# Altium PCB PCB)ControlBoard_22062018.PcbDoc
Units mm, origin at the board's own origin, x right, y up, seen from the top; angles counter-clockwise.
Board outline 55 x 77.5 mm, 2 copper layers (Top Layer, Bottom Layer), stack 1.671 mm thick; 62 components, 42 nets, 194 pads, 38 vias.
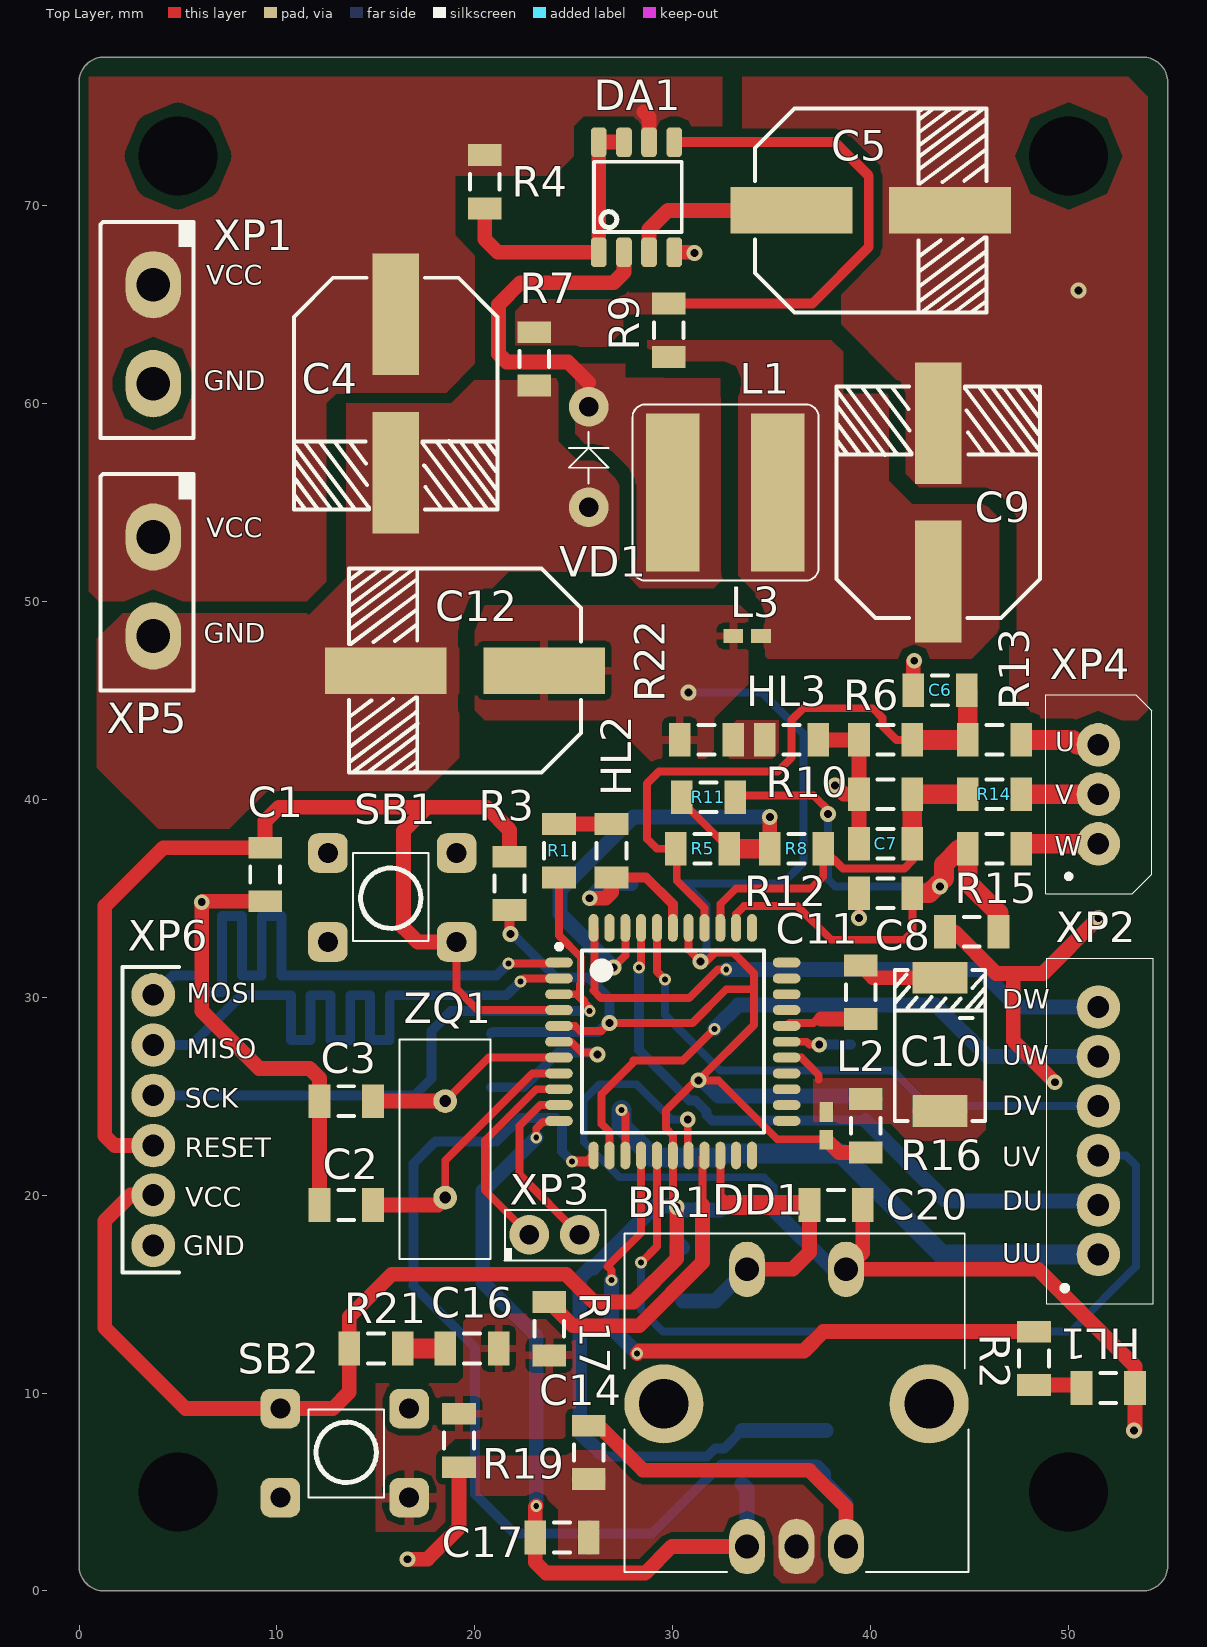
[diagram p0: Top Layer view]
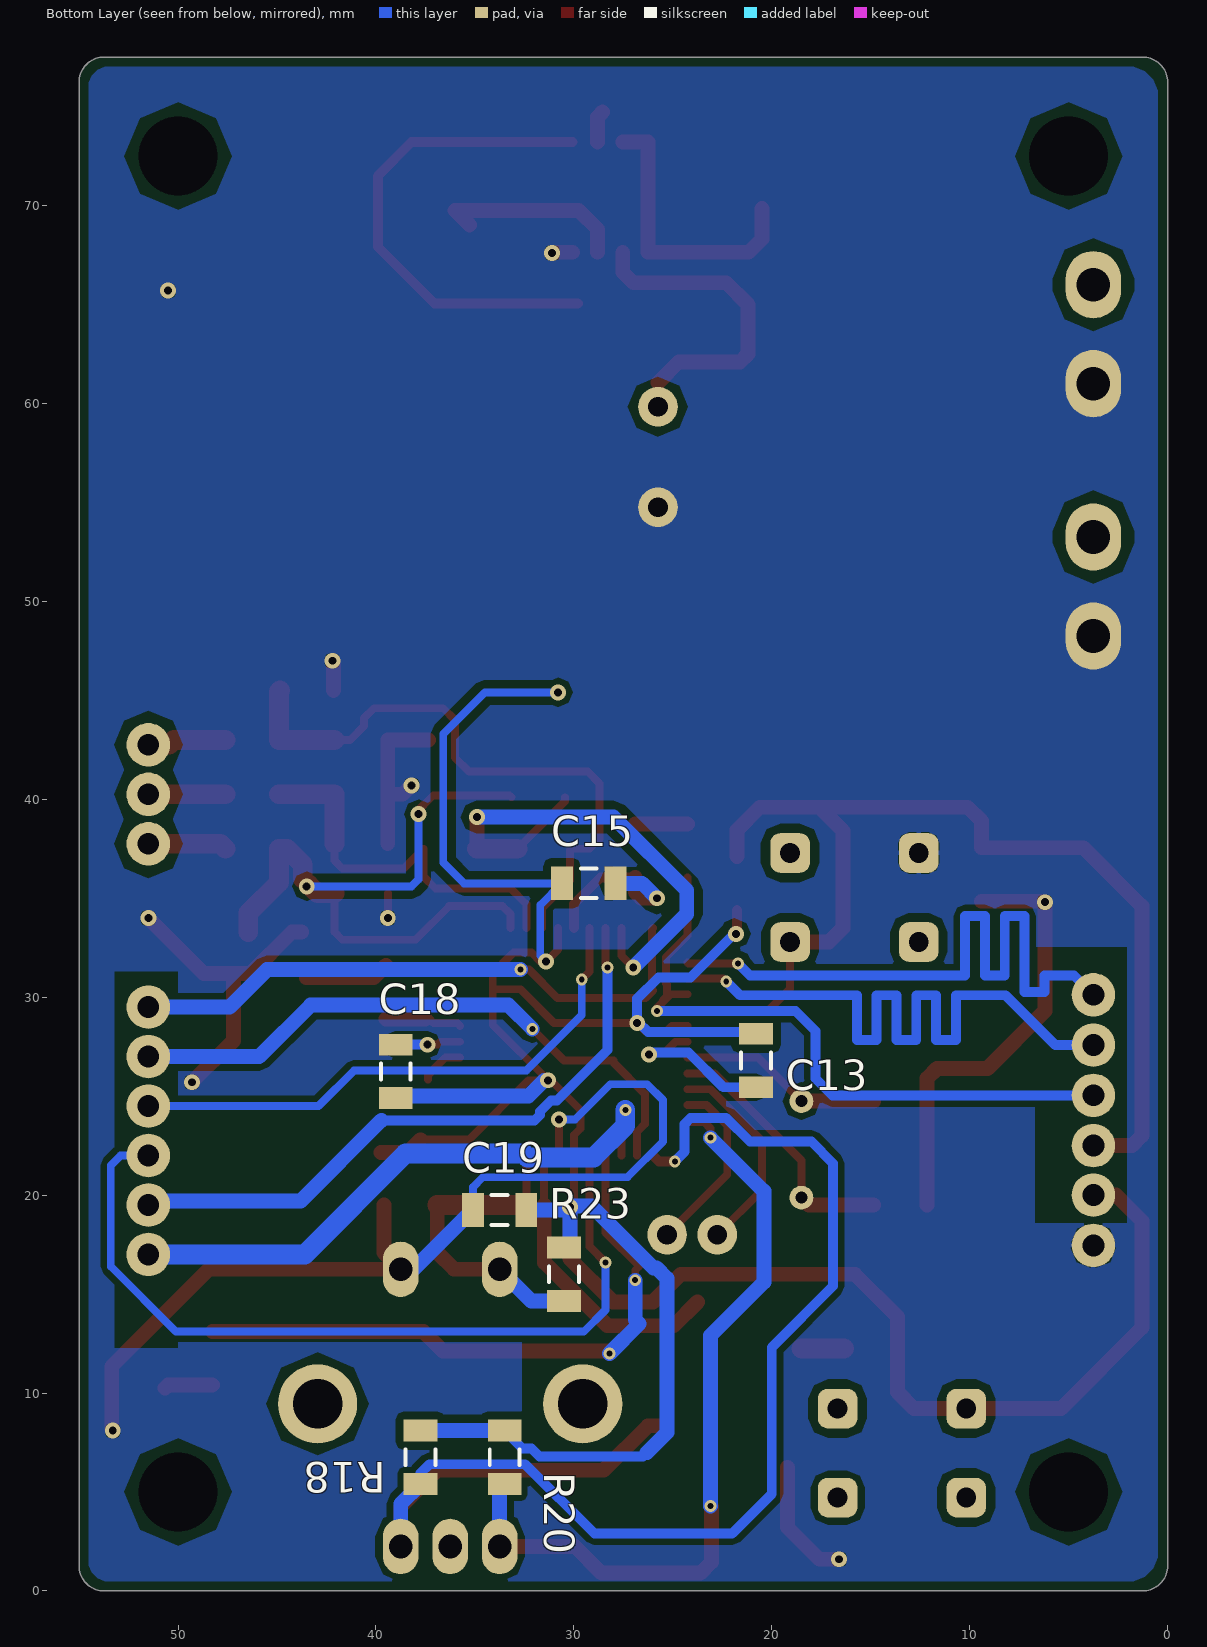
[diagram p1: Bottom Layer view, seen from below]
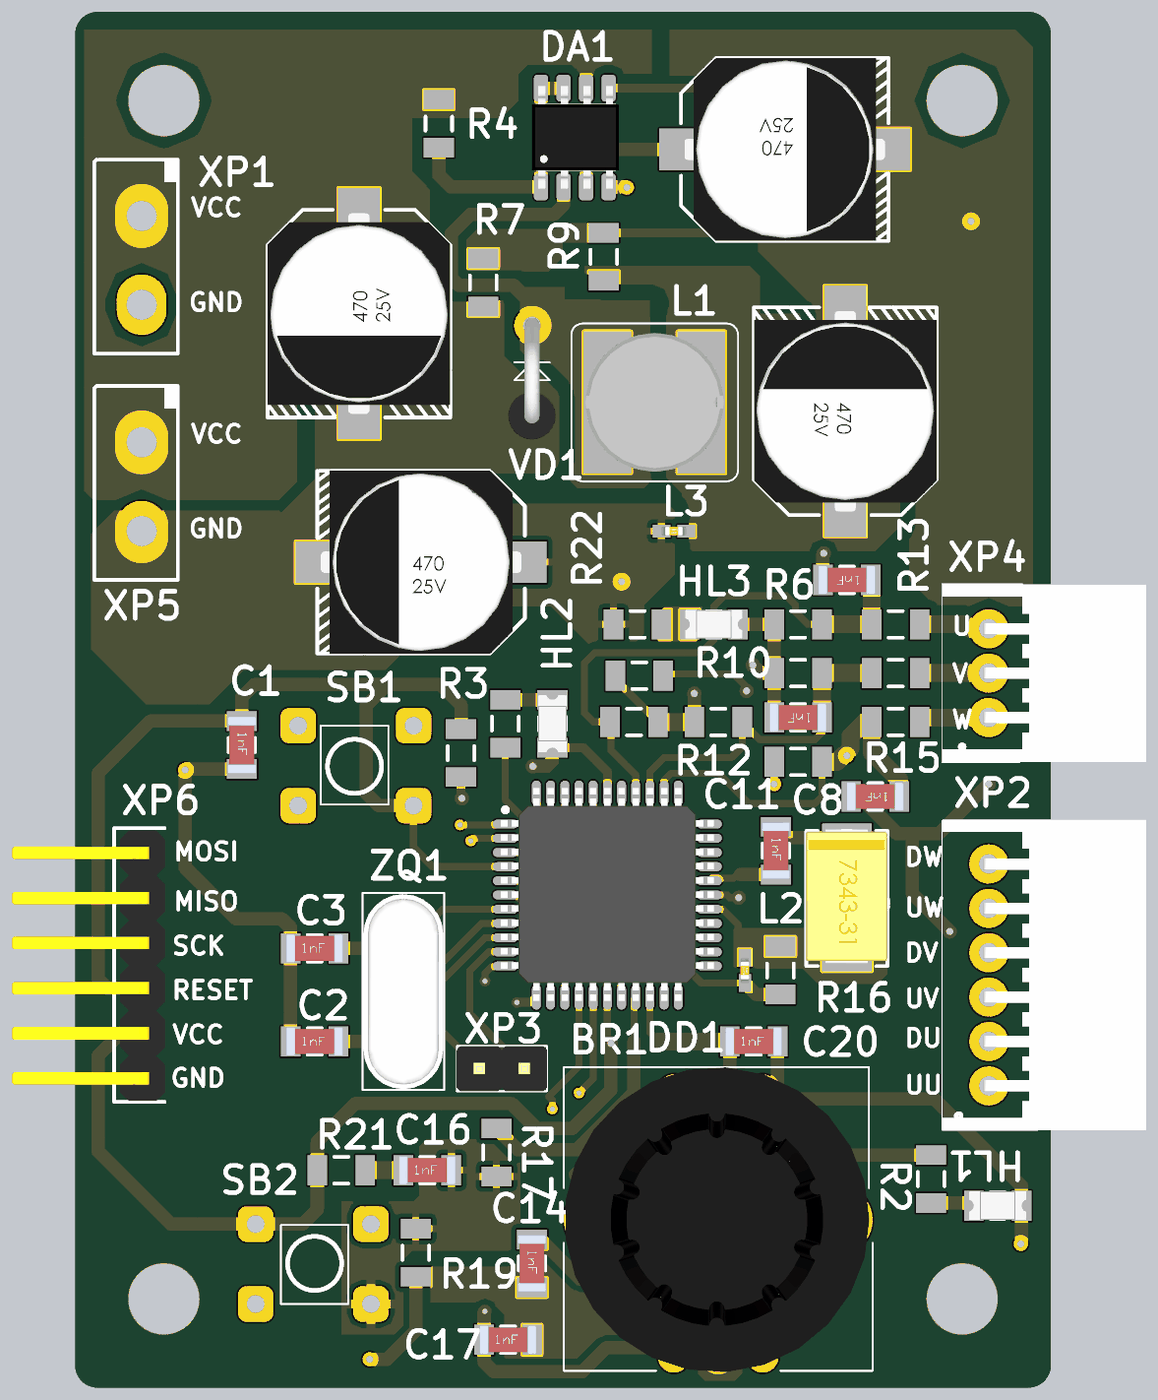
[diagram p2: 3D render of the assembled board from above, using the file's embedded part models]
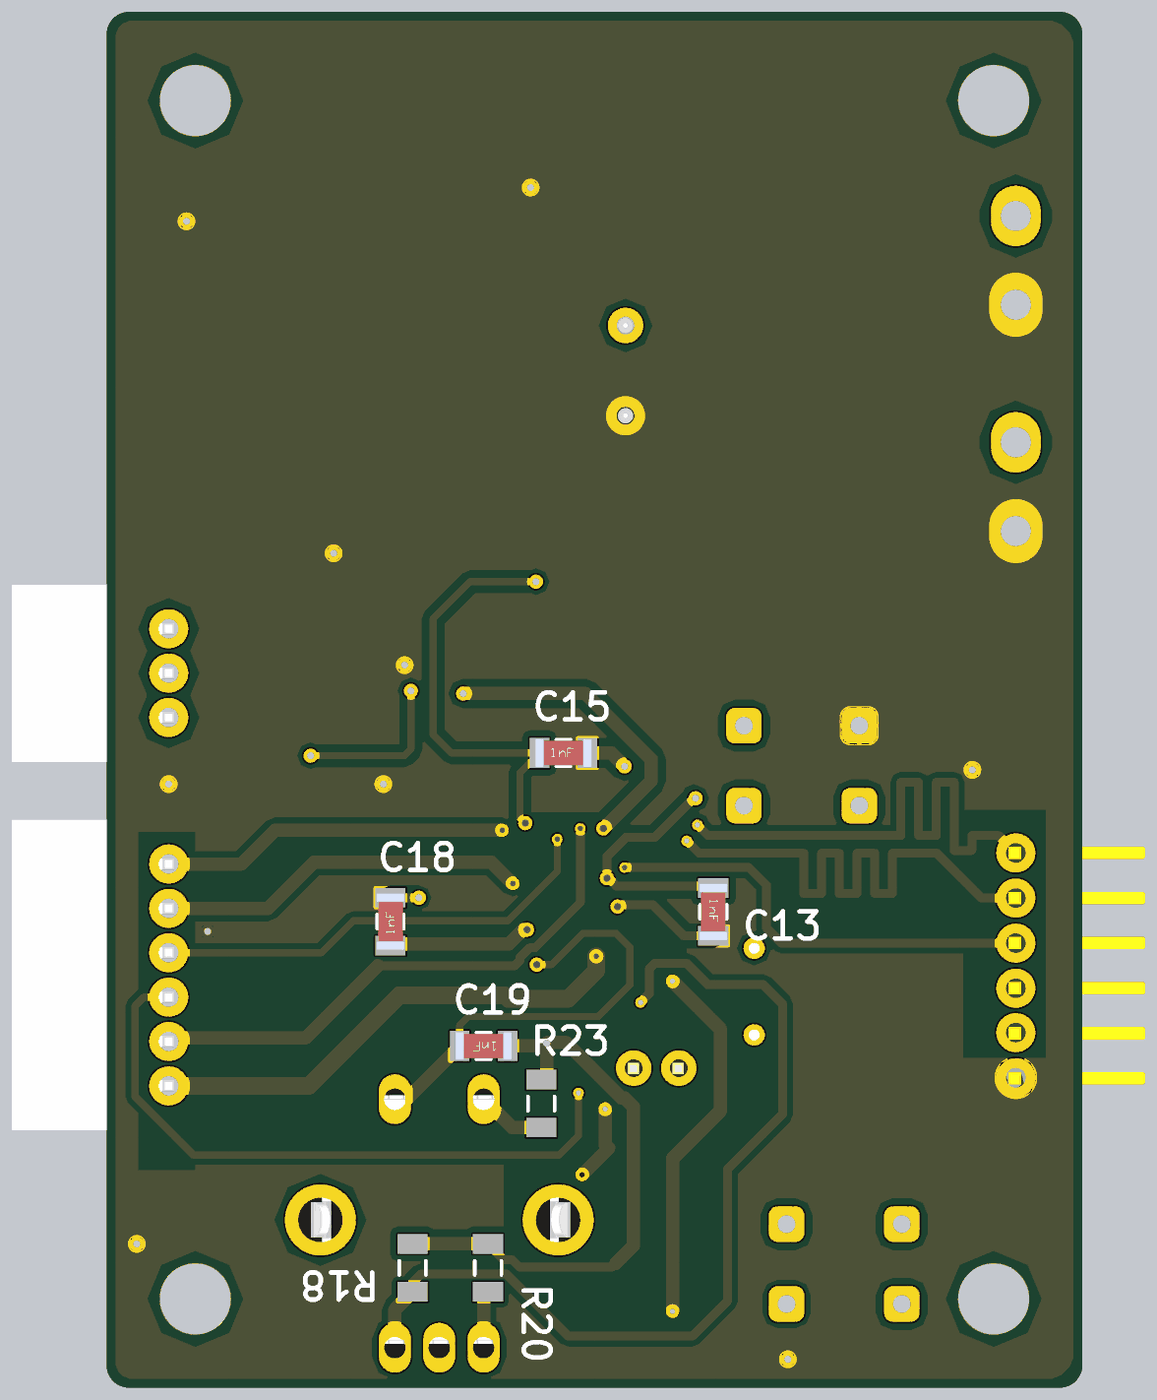
[diagram p3: 3D render of the assembled board from below, using the file's embedded part models]

## Layer stack, top to bottom
Top Solder: solder mask 0.0102, Solder Resist, Dk 3.5
Top Layer: signal copper 0.0356
Dielectric 1: dielectric 1.6, FR-4, Dk 4.8
Bottom Layer: signal copper 0.0356
Bottom Solder: solder mask 0.0102, Solder Resist, Dk 3.5

## Board outline
0,1.27 0,76.23 cw(c1.27,76.23) 1.27,77.5 53.73,77.5 cw(c53.73,76.23) 55,76.23 55,1.27 cw(c53.73,1.27) 53.73,0 1.27,0 cw(c1.27,1.27)

## Design rules (kind name [scope] priority, off if disabled: settings)
Clearance Clearance_12V [InNetClass('Input_Power')] p1: gap=0.5 ignorepadtopadclearanceinfootprint=FALSE except(0.3: Arc-THPad Track-THPad SMDPad-SMDPad SMDPad-THPad THPad-THPad; 0.4: Arc-Track Track-Track Track-SMDPad)
Clearance Clearance_NetSignal [InNetClass('Nets_Signal')or InNetClass('SPI_Prog')] p2: gap=0.5 ignorepadtopadclearanceinfootprint=FALSE except(0.2: Track-SMDPad SMDPad-SMDPad Via-Via; 0.3: Arc-Track Arc-SMDPad Arc-THPad Arc-Via Arc-Poly Track-Track Track-THPad Track-Via Track-Poly SMDPad-Via SMDPad-Poly THPad-THPad THPad-Via THPad-Poly Via-Poly; 0.8: Poly-Poly)
Clearance Clearance_Poligon [InPolygon] p3: gap=0.5 ignorepadtopadclearanceinfootprint=FALSE except(0.2: Arc-Via Track-Via SMDPad-Via THPad-Via Via-Via Via-Fill Via-Poly Via-Region; 0.3: Arc-THPad Arc-Fill Arc-Region Track-THPad Track-Fill Track-Region SMDPad-Fill SMDPad-Region THPad-Fill THPad-Region; 0.4: Arc-Arc Arc-Track Arc-SMDPad Arc-Poly Track-Track Track-SMDPad Track-Poly SMDPad-SMDPad SMDPad-Poly THPad-Poly Fill-Fill Fill-Poly Fill-Region Poly-Region Region-Region; 0.8: Poly-Poly)
Clearance Clearance_Power [InNetClass('Nets_5Vout')] p4: gap=0.5 ignorepadtopadclearanceinfootprint=FALSE except(0.2: Track-SMDPad SMDPad-SMDPad; 0.3: Arc-Track Arc-SMDPad Track-Track Track-THPad THPad-THPad)
Height [All] p1: minheight=0 maxheight=100 prefheight=12.7
Length Length_SPI [InNetClass('SPI_Prog')] p1: maxlimit=600 minlimit=0
MatchedLengths MatchedLengths_SPI [InNetClass('SPI_Prog')] p1: tolerance=1 checknetsindiffpair=FALSE checkdiffpairvsdiffpair=TRUE checkxsignals=TRUE checkothers=TRUE
PlaneClearance PlaneClearance_1 [InPadClass('PadPower')] p1: clearance=0.8
PlaneClearance [InNetClass('Nets_Signal') OR InNetClass('SPI_Prog')  OR InNetClass('Nets_5Vout')] p2: clearance=0.5
PlaneConnect PlaneConnect__Digit [InNetClass('Nets_Signal') OR InNetClass('SPI_Prog') OR InNetClass('Nets_5Vout')] p1: pad.planeconnectstyle=Relief pad.reliefexpansion=0.5 pad.reliefentries=4 pad.reliefconductorwidth=0.4 pad.reliefairgap=0.3 via.planeconnectstyle=Relief via.reliefexpansion=0.4 via.reliefentries=4 via.reliefconductorwidth=0.4 via.reliefairgap=0.3
PlaneConnect [InPadClass('PadPower')] p2: planeconnectstyle=Direct reliefexpansion=0.508 reliefentries=4 reliefconductorwidth=0.254 reliefairgap=0.254
PolygonConnect PolygonConnect_DIG5V [InNetClass('Nets_Signal') OR InNetClass('SPI_Prog')] p1: thpad.connectstyle=Relief thpad.reliefconductorwidth=0.5 thpad.reliefentries=4 thpad.polygonreliefangle="90 Angle" thpad.airgapwidth=0.3 smdpad.connectstyle=Relief smdpad.reliefconductorwidth=0.4 smdpad.reliefentries=4 smdpad.polygonreliefangle="90 Angle" smdpad.airgapwidth=0.3 via.connectstyle=Relief via.reliefconductorwidth=0.4 via.reliefentries=4 via.polygonreliefangle="90 Angle" via.airgapwidth=0.3
PolygonConnect PolygonConnect_Power [InPadClass('PadPower')] p2: connectstyle=Direct reliefconductorwidth=0.254 reliefentries=4 polygonreliefangle="90 Angle" airgapwidth=0.254
RoutingVias RoutingVias_Signal [InNetClass('Nets_Signal') OR InNetClass('SPI_Prog')] p1: holewidth=0.3 width=0.6 viastyle="Through Hole" minholewidth=0.3 minwidth=0.6 maxholewidth=0.3 maxwidth=0.6
RoutingVias RoutingVias_Power [InNetClass('Input_Power') OR InNetClass('Nets_5Vout')] p2: holewidth=0.4 width=0.8 viastyle="Through Hole" minholewidth=0.4 minwidth=0.8 maxholewidth=0.4 maxwidth=0.8
SolderMaskExpansion [All] p1: expansion=0.102
Width Width_5V [InNetClass('Nets_5Vout')] p1: maxlimit=2 minlimit=0.4 preferedwidth=0.5
Width Width_12V [InNetClass('Input_Power')] p2: maxlimit=2 minlimit=0.5 preferedwidth=0.75
Width Width_DIGIT [InNetClass('Nets_Signal') OR InNetClass('SPI_Prog')] p3: maxlimit=1 minlimit=0.2 preferedwidth=0.4
27 further rules are at their usual default settings.

## Classes and differential pairs
net class SPI_Prog: MISO MOSI SCK
net class Nets_Signal: DOWN_U DOWN_V DOWN_W ENC1 ENC2 ENC3 NetC16_1 NetC16_2 NetDD1_15 NetHL1_1 NetHL2_1 RxD TxD UP_U UP_V UP_W XTAL1 XTAL2
net class Nets_5Vout: +5V ADC_COMP ADC_U ADC_V ADC_W AREF AVCC GND NetC9_1 NetC10_2 NetDA1_2 NetDA1_5 NetHL3_1 RESET
net class Input_Power: +12V NetDA1_1 NetR13_1 NetR14_1 NetR15_1
pad class PadPower: BR1-3 C4-1 C4-2 C5-1 C5-2 C9-1 C9-2 C12-1 C12-2 HL3-1 HL3-2 L1-1 L1-2 L3-1 L3-2 R4-1 R4-2 R7-1 R7-2 R9-1 R9-2 R13-1 R13-2 R14-1 R14-2 R15-1 R15-2 R22-1 R22-2 VD1-1 VD1-2 XP1-1 XP1-2 XP5-1 XP5-2

## Components (designator, comment, footprint, x,y, rotation, side; value= is the part's Value field where it differs from the comment)
BR1 "EN11 - VSM 1 A F 20" EN11-HSM 33.75,2.25 r0 top
C1 "100nF" CAP1206 9.4,36.2 r270 top
C2 "22pF" CAP1206 13.5,19.5 r0 top
C3 "22pF" CAP1206 13.5,24.75 r0 top
C4 "220uF" CAPAE120103X105MTypeG 16,60.5 r270 top
C5 "470uF" CAPAE120103X105MTypeG 40,69.75 r0 top
C6 "100nF" CAP1206 43.5,45.5 r180 top
C7 "100nF" CAP1206 40.75,37.75 r180 top
C8 "100nF" CAP1206 45.1,33.3 r180 top
C9 "470uF" CAPAE120103X105MTypeG 43.409,55 r90 top
C10 "10uF" "Type D" 43.5,24.25 r90 top
C11 "100nF" CAP1206 39.5,30.25 r270 top
C12 "220uF" CAPAE120103X105MTypeG 19.5,46.5 r180 top
C13 "100nF" CAP1206 20.8,26.8 r270 bottom
C14 "100nF" CAP1206 25.75,7 r270 top
C15 "100nF" CAP1206 29.25,35.75 r180 bottom
C16 "100nF" CAP1206 19.85,12.25 r0 top
C17 "100nF" CAP1206 24.4,2.7 r0 top
C18 "100nF" CAP1206 39,26.25 r90 bottom
C19 "100nF" CAP1206 33.75,19.25 r0 bottom
C20 "100nF" CAP1206 38.25,19.5 r0 top
DA1 "MC34063" SO-8 26.26,68.4 r90 top
DD1 "ATMega16" TQFP80P1200X1200X120-44N 30,27.75 r0 top
HL1 "GNL-1206UYC" LED1206 52,10.25 r0 top value=YELLOW
HL2 "GNL-1206UYC" LED1206 26.9,37.4 r270 top value=YELLOW
HL3 "GNL-1206URC" LED1206 36,43 r0 top value=RED
L1 "SDR0805-221KL" SDR0805 30,55.5 r270 top value=220uH
L2 "1u" LQG15HN15NJ 37.75,23.5 r270 top
L3 "1u" LQG15HN15NJ 33.75,48.25 r180 top
R1 "470" 1206 24.25,37.4 r90 top
R2 "470" 1206 48.25,11.75 r270 top
R3 "1k Ом" 1206 21.75,35.75 r270 top
R4 "0,33 Ом" 1206 20.5,71.2 r270 top
R5 "4.7 кОм" 1206 31.5,37.5 r180 top
R6 "10кОм" 1206 40.75,43 r180 top
R7 "1.2k Ом" 1206 23,62.25 r90 top
R8 "4.7 кОм" 1206 36.25,37.5 r0 top
R9 "3.6kОм" 1206 29.8,63.7 r270 top
R10 "10кОм" 1206 40.75,40.25 r180 top
R11 "4.7 кОм" 1206 31.8,40.1 r0 top
R12 "10кОм" 1206 40.75,35.25 r180 top
R13 "4.7 кОм" 1206 46.25,43 r180 top
R14 "4.7 кОм" 1206 46.25,40.25 r180 top
R15 "4.7 кОм" 1206 46.25,37.5 r180 top
R16 "2 кОм" 1206 39.75,23.5 r270 top
R17 "220" 1206 23.75,13.25 r270 top
R18 "4.7 кОм" 1206 37.75,6.75 r90 bottom
R19 "10кОм" 1206 19.2,7.6 r90 top
R20 "4.7 кОм" 1206 33.5,6.75 r90 bottom
R21 "130 Ом" 1206 15,12.25 r180 top
R22 "470" 1206 31.7,43 r180 top
R23 "4.7 кОм" 1206 30.5,16 r90 bottom
SB1 "IT-1109" KLS2 15.75,35 r0 top
SB2 "IT-1109" KLS2 13.5,7 r180 top
VD1 "1N5819" DO-41-V 25.75,54.75 r90 top value=40V
XP1 "XY2500R-A-2P" KLS2-EDR-500-2P 3.75,66 r270 top value=1000V
XP2 "CWF-6R" CWF-6R 51.5,17 r90 top
XP3 "PLS2-1" PLS-2-1 22.75,18 r0 top
XP4 "CWF-3R" CWF-3R 51.5,37.75 r90 top
XP5 "XY2500R-A-2P" KLS2-EDR-500-2P 3.75,53.25 r270 top value=1000V
XP6 "PLS1x6" PLS1x6 3.75,30.12 r270 top
ZQ1 "8MHz" HC49-S 18.5,19.87 r90 top

## Footprints (in the part's own frame and the unit in brackets; to place one, negate y for a bottom-side part, rotate by r counter-clockwise, add the part's x,y. Pads: shape width x height; smd on the part's side, far side on the other; paste and mask are expansions set on the pad)
1206 [mm]
  rect 1.1x1.7 smd: 1(-1.35,0) 2(1.35,0)
  silkscreen extent -0.4,-0.75 0.4,0.75, body extent -1.55,-0.83 1.55,0.83, height 0.67
CAP1206 [mm]
  rect 1.1x1.7 smd: 1(-1.35,0) 2(1.35,0)
  silkscreen extent -0.4,-0.75 0.4,0.75, body extent -1.6,-0.8 1.6,0.8, height 1.25
CAPAE120103X105MTypeG [mm] "Aluminum Electrolytic Capacitor, Body 11,70x10,30x10,50mm, IPC Low Density"
  rect 6.15x2.35 smd: 1(-4,0) 2(4,0)
  silkscreen extent -5.85,-5.15 5.86,5.15, body extent -5.65,-5.15 5.65,5.15, height 10.8
CWF-3R [mm]
  round 2.2 hole 1.1: 1(5,0) 2(2.5,0) 3(0,0)
  silkscreen extent -2.52,-2.7 7.53,2.65, body extent -2.5,-8.88 7.5,2.62, height 5.75
CWF-6R [mm]
  round 2.2 hole 1.1: 1(0,0) 2(2.5,0) 3(5,0) 4(7.5,0) 5(10,0) 6(12.5,0)
  silkscreen extent -2.5,-2.78 14.97,2.63, body extent -2.5,-8.88 15,2.62, height 5.75
DO-41-V [mm] "Vertical"
  round 2 hole 1: 1(0,0) 2(5.08,0)
  silkscreen extent 1.2,-1 3.8,1, body extent -1.35,-1.35 5.51,1.35, height 8.43
EN11-HSM [mm]
  oval 1.8x2.8 hole 1.2: 1(0,0) 2(5,0) 3(2.5,0) 4(5,14) 5(0,14)
  round 4 hole 2.5: -(-4.2,7.2) -(9.2,7.2)
  silkscreen extent -6.2,-1.3 11.2,15.8, body extent -6.18,-1.39 11.02,15.81, height 34
HC49-S [mm]
  round 1.2 hole 0.6: 1(0,0) 3(4.88,0)
  silkscreen extent -3.1,-2.3 8,2.3, body extent -3.05,-2.25 7.93,2.25, height 3.6
KLS2 [mm]
  rrect50% 2x2 hole 1: 1(-3.175,2.286) 2(3.325,2.286) 3(-3.175,-2.214) 4(3.325,-2.214)
  silkscreen extent -1.91,-2.16 1.9,2.29, body extent -3.12,-3 3.38,3, height 7.5
KLS2-EDR-500-2P [mm]
  oval 3.4x2.8 hole 1.7: 1(0,0) 2(5,0)
  silkscreen extent -3.18,-2.67 7.75,2.03, body extent -3,-20.69 7.49,1.64, height 18.12
LED1206 [mm]
  rect 1.1x1.7 smd: 1(-1.35,0) 2(1.35,0)
  silkscreen extent -0.4,-0.75 0.4,0.75, body extent -1.6,-0.8 1.6,0.8, height 1.1
LQG15HN15NJ [mm]
  rect 1x0.7 smd: 1(-0.7,0) 2(0.7,0)
  body extent -0.73,-0.25 0.73,0.25, height 0.51
PLS1x6 [mm]
  round 2.2 hole 1.1: 1(0,0) 2(2.54,0) 3(5.08,0) 4(7.62,0) 5(10.12,0) 6(12.66,0)
  silkscreen extent -1.4,-1.55 14.03,1.3, body extent -1.27,-7.29 13.97,1.33, height 6.55
PLS-2-1 [mm]
  round 2 hole 1: 1(0,0) 2(2.54,0)
  silkscreen extent -1.25,-1.33 3.85,1.25, body extent -1.24,-1.3 3.84,1.24, height 8.54
SDR0805 [mm]
  rect 8x2.7 smd: 1(0,0) 2(0,5.3)
  silkscreen extent -4.45,-2.03 4.44,7.37, body extent -3.9,-1.23 3.9,6.57, height 5.3
SO-8 [mm]
  rrect50% 1.505x0.802 smd: 1(-0.762,0) 2(-0.762,-1.27) 3(-0.762,-2.54) 4(-0.762,-3.81) 5(4.8,-3.81) 6(4.8,-2.54) 7(4.8,-1.27) 8(4.8,0)
  silkscreen extent 0.25,-4.19 3.81,0.25, body extent -0.86,-4.39 4.92,0.51, height 1.45
TQFP80P1200X1200X120-44N [mm] "TQFP, 44-Leads, Body 10,00x10,00mm, Pitch 0,80mm, IPC Medium Density"
  oval 1.4x0.5 smd: 1(-5.75,4) 2(-5.75,3.2) 3(-5.75,2.4) 4(-5.75,1.6) 5(-5.75,0.8) 6(-5.75,0) 7(-5.75,-0.8) 8(-5.75,-1.6) 9(-5.75,-2.4) 10(-5.75,-3.2) 11(-5.75,-4) 23(5.75,-4) 24(5.75,-3.2) 25(5.75,-2.4) 26(5.75,-1.6) 27(5.75,-0.8) 28(5.75,0) 29(5.75,0.8) 30(5.75,1.6) 31(5.75,2.4) 32(5.75,3.2) 33(5.75,4)
  oval 0.5x1.4 smd: 12(-4,-5.75) 13(-3.2,-5.75) 14(-2.4,-5.75) 15(-1.6,-5.75) 16(-0.8,-5.75) 17(0,-5.75) 18(0.8,-5.75) 19(1.6,-5.75) 20(2.4,-5.75) 21(3.2,-5.75) 22(4,-5.75) 34(4,5.75) 35(3.2,5.75) 36(2.4,5.75) 37(1.6,5.75) 38(0.8,5.75) 39(0,5.75) 40(-0.8,5.75) 41(-1.6,5.75) 42(-2.4,5.75) 43(-3.2,5.75) 44(-4,5.75)
  silkscreen extent -5.87,-4.6 4.6,4.92, body extent -6,-5.97 6,6.03, height 1.1
"Type D" [mm]
  rect 1.6x2.8 smd: 1(0,0) 2(6.731,0)
  silkscreen extent -0.51,-2.29 7.11,2.29, body extent -0.37,-2.29 7.23,2.31, height 3.1

## Part data
BR1: library part Encoder, Manufacturer=TTelectronics, Package=CWF-3R, Documentation=http://belchip.by/sitedocs/18676.pdf, Part Number="EN11 - VSM 1 A F 20", Price=0.05, Quantity=3, ShoppingPlace=http://belchip.by/product/?selected_product=17773
C1 C6 C7 C8 C11 C13 C14 C15 C16 C17 C18 C19 C20: library part Capasitor, Manufacturer=Samsung, Package=1206, Part Number=CL31B104KBCNNNC, Voltage=50V, Price=0,035, Quantity=4, ShoppingPlace=http://belchip.by/product/?selected_product=31093
C2 C3: library part Capasitor, Manufacturer=Samsung, Package=1206, Part Number=NPO-50V, Voltage=50V, Price=0.025, Quantity=2, ShoppingPlace=http://belchip.by/product/?selected_product=00259
C4 C12: library part "Capasitor Electrolit", Manufacturer=Китай, Package=10x10, Part Number="220uF 35V 10x10", Power=10V, Documentation=http://belchip.by/product/?selected_product=32976, Price=1, Quantity=3, ShoppingPlace=http://belchip.by/product/?selected_product=32976
C5 C9: library part "Capasitor Electrolit", Manufacturer=EPCOS, Package=8x10, Part Number=B41121A3477M000, Power=25V, Documentation=https://static.chipdip.ru/lib/051/DOC000051935.pdf, Price=2, ShoppingPlace=https://www.ru-chipdip.by/product/b41121a3477m000
C10: library part "Capasitor Electrolit", Manufacturer=Vishay, Package=TypeD, Part Number="D 10uF 25V 20", Power=25V, Price=0,23, ShoppingPlace=http://belchip.by/product/?selected_product=00096
DA1: Manufacturer="ON Semiconductor", Package=SO-8, Part Number=MC34063, Price=0,3, Quantity=1, ShoppingPlace=http://belchip.by/product/?selected_product=28823
DD1: library part "ATMega 16", Manufacturer=ATmel, Package=TQFP44, Documentation=http://belchip.by/sitedocs/00002095.pdf, Part Number=ATMega16, Price=5,2, Quantity=1, ShoppingPlace=http://belchip.by/product/?selected_product=02095
HL1 HL2 HL3: library part LED, Manufacturer=G-NOR, Package=1206, Price=0.06, Quantity=6
  HL1 HL2: Part Number=GNL-1206UYC, ShoppingPlace=http://belchip.by/product/?selected_product=00949
  HL3: Part Number=GNL-1206URC, ShoppingPlace=http://belchip.by/product/?selected_product=00953
L1: library part Induc_SD1105, Manufacturer=BOURNS, Package=SDR0805, Documentation=http://docs-europe.electrocomponents.com/webdocs/150d/0900766b8150ddf1.pdf, Part Number=SDR0805-221KL, Price=1, Quantity=1, ShoppingPlace=https://www.ru-chipdip.by/product/sdr1105-201k
L2 L3: library part Inductor, Manufacturer=Bourns, Package=1812, Part Number=CM453232-1R0KL, Price=0.225, Quantity=2, ShoppingPlace=https://www.ru-chipdip.by/product/cm453232-1r0kl
R1 R2 R22: library part Resistor, Manufacturer=YAGEO, Package=1206, Part Number=RC1206JR-07470RL, Power=0.25W, Price=0.15, Quntity=3, ShoppingPlace=http://belchip.by/product/?selected_product=32449
R3: library part Resistor, Manufacturer="Royal Ohm", Package=1206, Part Number=RC1206FR-071KL, Power=0.25W, Price=0,02, Quntity=1, ShoppingPlace=http://belchip.by/product/?selected_product=19295
R4: library part Resistor, Manufacturer="Royal Ohm", Package=1206, Part Number=RC1206FR-12060R33, Power=0.25W, Documentation=http://belchip.by/sitedocs/18520.pdf, Price=0,5, Quntity=1, ShoppingPlace=http://belchip.by/product/?selected_product=32979
R5 R6 R8 R10 R11 R12 R13 R14 R15 R18 R20 R23: library part Resistor, Manufacturer=YAGEO, Package=1206, Part Number=RC1206JR-074K7L, Power=0.25W, Price=0,15, Quntity=4, ShoppingPlace=http://belchip.by/product/?selected_product=01399
R7: library part Resistor, Manufacturer=РФ, Package=1206, Part Number="1206 1.2K", Power=0.25W, Price=0,15, Quntity=1, ShoppingPlace=http://belchip.by/product/?selected_product=01386
R9: library part Resistor, Manufacturer=РФ, Package=1206, Part Number="1206 3.6K", Power=0.25W, Price=1, Quntity=1, ShoppingPlace=http://belchip.by/product/?selected_product=01396
R16: library part Resistor, Manufacturer=РФ, Package=1206, Part Number="SMD 1206 2K", Power=0,25W, Price=0,15, Quntity=1, ShoppingPlace=http://belchip.by/product/?selected_product=01391
R17: library part Resistor, Manufacturer="Royal Ohm", Package=1206, Part Number=HP06-220R5, Power=0.25W, Price=0,02, Quntity=1, ShoppingPlace=http://belchip.by/product/?selected_product=06325
R19: library part Resistor, Manufacturer=YAGEO, Package=1206, Part Number=RC1206JR-0710KL, Power=0.25W, Price=0.15, Quntity=1, ShoppingPlace=http://belchip.by/product/?selected_product=31101
R21: library part Resistor, Manufacturer=RF, Package=1206, Part Number=130R, Power=0.25W, Price=0,15, Quntity=1, ShoppingPlace=http://belchip.by/product/?selected_product=01363
SB1 SB2: library part Button, Manufacturer=RUICHI, Package=4,5x4,5x3,8, Part Number=IT-1109, Price=0,1, Quantity=2, ShoppingPlace=http://belchip.by/product/?selected_product=03267
VD1: Manufacturer=GALAXY, Package=SOD-123, Power=1A, Part Number=1N5819, Price=0.12, Quantity=3, ShoppingPlace=http://belchip.by/product/?selected_product=08853
XP1 XP5: library part Connector_Power, Manufacturer=РБ, Package=XY2500R-A-2P, Part Number=XY2500R-A-2P, Price=0,10, Quantity=2, ShoppingPlace=http://belchip.by/product/?selected_product=14514
XP2 XP3 XP4: Manufacturer=KLS
  XP2: Part Number=CWF-6R, Price=1, Quantity=1, ShoppingPlace=http://belchip.by/product/?selected_product=32444
  XP3: Package=PLS2-1, Part Number=PLS2-1, Price=0.05, Quantity=3, ShoppingPlace=http://belchip.by/product/?selected_product=31993
  XP4: Package=CWF-3R, Part Number=CWF-3R, Price=0.05, Quantity=3, ShoppingPlace=http://belchip.by/product/?selected_product=32444
XP6: Manufacturer=KLS, Part Number=KLS1x6, Price=1, Quantity=1, ShoppingPlace=http://belchip.by/product/?selected_product=02010
ZQ1: library part Rzanator, Manufacturer=CHina, Package=HC-51, Part Number=HC49US-FF5F8.0000, Price=0,37, Quantity=1, ShoppingPlace=http://belchip.by/product/?selected_product=04623

## Free pads (board coordinates)
  round 0 hole 4: -(5,5) -(5,72.5) -(50,5) -(50,72.5)

## Via types
v1: diameter 0.8, hole 0.4, Top Layer to Bottom Layer, 13 vias
v2: diameter 0.6, hole 0.3, Top Layer to Bottom Layer, 10 vias
v3: diameter 0.8, hole 0.4, Top Layer to Bottom Layer, tented top, 9 vias
v4: diameter 0.6, hole 0.3, Top Layer to Bottom Layer, tented top, 4 vias
v5: diameter 0.8, hole 0.4, Top Layer to Bottom Layer, tented both sides, 2 vias

## Nets (pads, with @x,y where several pads share a name; then routed paths per layer and width w, separated by ;. In a path a pad name is that pad's centre, name@x,y a point inside that pad or via, vN(x,y) a via of type N, cw(c..) or ccw(c..) an arc to the next point about the centre after c; other vN are vias at no path point)
+5V: C12.1 C13.1 C15.1 C18.1 C19.1 DD1.5 DD1.17 DD1.38 L2.2 L3.2 R3.2 R16.2 R18.2 R20.2 R21.2 R22.2 R23.2 SB2.4 XP6.5 | length 167.2
  Top Layer w0.4: DD1.5 25.05,28.55 25.3,28.3 26.4,28.3 v1(26.8,28.7) 31,28.7 32.7,30.4 34.1,30.4 ; 30,19.8 DD1.17 30,23.027 29.655,23.372 29.655,24.283 31.172,25.8 v1(31.3,25.8) ; DD1.38 30.8,32.4 v1(31.4,31.8) 31.683,31.8 32.133,32.25 33.052,32.25 33.151,32.151 34.1,31.202 34.1,30.4 ; L2.2 35.3,22.8 32.3,25.8 v1(31.3,25.8) ; v1(31.3,25.8) 34.1,28.6 34.1,30.4
  Top Layer w0.5: R3.2 21.75,33.25 v3(21.8,33.2)
  Top Layer w0.75: XP6.5 2.6,20 1.3,18.7 1.3,13.3 5.386,9.214 SB2.4 12.814,9.214 13.65,10.05 R21.2 13.65,13.85 15.8,16 24.6,16 26,14.6 28.015,14.6 30.2,16.785 v5(30.2,19.4) ; L2.2 38.4,22.15 R16.2
  Bottom Layer w0.4: v1(30.8,45.4) 34.5,45.4 36.6,43.3 36.6,36.8 35.55,35.75 C15.1 31.7,34.65 31.7,32.1 v1(31.4,31.8)
  Bottom Layer w0.5: C13.1 20.9,28.25 26.25,28.25 26.7,28.7 v1(26.8,28.7) 26.8,29.931 25.731,31 24.1,31 21.9,33.2 21.9,33.3 v3(21.8,33.2) ; 26.3,7 26.5,6.8 31.732,6.8 32.132,7.2 32.6,7.2 R20.2
  Bottom Layer w0.75: 26.3,7 25.3,8 25.3,15.8 25.825,16.325 25.984,16.325 29.1,19.441 30.159,19.441 v5(30.2,19.4) ; R23.2 30.2,17.65 v5(30.2,19.4) ; v1(31.3,25.8) 31.5,25.8 32.3,25 38.9,25 C18.1 ; C19.1 30.35,19.25 v5(30.2,19.4) ; R20.2 R18.2
+12V: C4.1 DA1.6 R4.1 XP1.1 XP5.1 | length 1.6
  Top Layer w0.75: 28.55,74.725 28.8,74.475 DA1.6
ADC_COMP: DD1.42 R5.1 R8.1 R11.1 | length 26.6
  Top Layer w0.4: v3(27,31.5) 27.6,32.1 DD1.42 ; R11.1 30.45,39.9 R5.1
  Top Layer w0.75: R8.1 v3(34.9,39.1)
  Top Layer w1: R5.1 R8.1
  Bottom Layer w0.75: v3(27,31.5) 24.3,34.2 24.3,35.4 28,39.1 v3(34.9,39.1)
ADC_U: C6.1 DD1.37 R5.2 R6.1 R13.2 | length 31.4
  Top Layer w0.4: DD1.37 31.6,34.5 30.2,35.9 30.2,37.45 R5.2 29.2,37.5 28.7,38 28.7,40.8 29.3,41.4 35.3,41.4 36,42.1 36,44 36.6,44.6 40.1,44.6 40.6,44.1 40.6,43.7 41.3,43 R6.1
  Top Layer w1: R6.1 R13.2 44.9,45.45 C6.1
ADC_V: C7.1 DD1.36 R8.2 R10.1 R14.2 | length 19.6
  Top Layer w0.4: DD1.36 32.4,34.7 33.2,35.5 37,35.5 37.6,36.1 R8.2 38.6,36.5 41.7,36.5 42.1,36.9 C7.1
  Top Layer w1: C7.1 R10.1 R14.2
ADC_W: C8.1 DD1.35 R11.2 R12.1 R15.2 | length 35.7
  Top Layer w0.4: R11.2 33.25,40.2 37.1,40.2 38,39.3 37.95,39.25 v3(37.847,39.25) ; DD1.35 33.2,34.2 33.6,34.6 36.3,34.6 38,32.9 41.7,32.9 42.1,33.3 R12.1
  Top Layer w1: R12.1 42.95,35.25 v1@43.4,35.7 ; 43.7,36 43.7,36.7 44.5,37.5 R15.2 44.9,35.8 46.45,34.25 C8.1
  Bottom Layer w0.4: v3(37.847,39.25) 37.847,35.953 38.2,35.6 v1(43.5,35.6)
AREF: C11.2 DD1.29 | length 3.9
  Top Layer w0.4: DD1.29 35.9,28.7 37.1,28.7 37.3,28.9 37.5,28.9
  Top Layer w0.75: 37.5,28.9 C11.2
AVCC: C10.1 DD1.27 L2.1 R16.1 | length 2.2
  Top Layer w0.4: DD1.27 36.494,26.95 37.375,26.069 37.375,25.85
DIR_BUT: DD1.19 R17.1 | length 15
  Top Layer w0.4: 31.5,19.5 31.5,21.9 DD1.19
  Top Layer w0.75: R17.1 24.95,13.4 28.3,13.4 31.5,16.6 31.5,19.5
DOWN_U: DD1.41 XP2.2 | length 32.8
  Top Layer w0.4: v2(28.3,31.5) 28.4,31.6 DD1.41
  Bottom Layer w0.5: v2(28.3,31.5) 28.3,27.325 30.848,24.777 31.149,24.777 31.705,24.221 31.705,24.051 31.981,23.775 39.725,23.775
  Bottom Layer w0.75: 39.725,23.775 43.8,19.7 51.3,19.7 XP2.2
DOWN_V: DD1.40 XP2.4 | length 28.4
  Top Layer w0.4: DD1.40 29.2,31.3 v2(29.6,30.9)
  Bottom Layer w0.4: v2(29.6,30.9) 29.6,29.1 32.4,26.3 41.1,26.3 42.9,24.5 XP2.4
DOWN_W: DD1.44 XP2.6 | length 30.3
  Top Layer w0.4: DD1.44 26.05,33.45 26.05,30.391 26,30.341 26,30.327 26.377,29.95 30.823,29.95 32.273,31.4 v2(32.7,31.4)
  Bottom Layer w0.75: v2(32.7,31.4) 45.5,31.4 47.4,29.5 XP2.6
ENC1: BR1.5 C20.1 DD1.20 R23.1 | length 16.5
  Top Layer w0.4: DD1.20 32.4,20 32.9,19.5
  Top Layer w0.75: BR1.5 36.05,16.25 36.9,17.1 C20.1
  Top Layer w1: 32.9,19.5 C20.1
  Bottom Layer w0.75: R23.1 32.15,14.65 BR1.5
ENC2: BR1.1 C17.1 DD1.11 R20.1 | length 40.2
  Top Layer w0.4: v4(23.1,22.9) 23.1,23.36 23.44,23.7 24.2,23.7 DD1.11
  Top Layer w0.75: v4(23.1,4.3) 23.05,4.25 C17.1 23.05,1.45 23.6,0.9 28.6,0.9 29.95,2.25 BR1.1
  Bottom Layer w0.75: v4(23.1,4.3) 23.1,12.9 20.4,15.6 20.4,20.2 v4(23.1,22.9) ; R20.1 33.75,5.15 BR1.1
ENC3: BR1.2 C14.1 DD1.12 R18.1 | length 70.9
  Top Layer w0.5: v4(24.9,21.7) 25.7,21.7 DD1.12
  Top Layer w0.75: C14.1 26.25,8.35 28.5,6.1 36.9,6.1 38.75,4.25 BR1.2
  Bottom Layer w0.5: v4(24.9,21.7) 24.4,22.2 24.4,23.6 24.1,23.9 22.3,23.9 21.1,22.7 18,22.7 16.9,21.6 16.9,15.4 20,12.3 20,4.9 22,2.9 28.964,2.9 32.464,6.4 37.3,6.4 37.75,5.95 R18.1
  Bottom Layer w0.75: R18.1 38.75,4.4 BR1.2
GND: BR1.3 BR1.4 C1.2 C2.1 C3.1 C4.2 C5.2 C6.2 C7.2 C8.2 C9.2 C12.2 C13.2 C14.2 C15.2 C17.2 C18.2 C19.2 C20.2 DA1.4 DD1.6 DD1.18 DD1.28 DD1.39 HL1.2 HL2.2 HL3.2 R6.2 R7.1 R10.2 R12.2 R19.1 SB1.1 VD1.1 XP1.2 XP5.2 XP6.6 | length 129.4
  Top Layer w0.4: DD1.6 24.86,27.75 25.41,27.2 26.1,27.2 v1(26.2,27.1) ; v1(30.755,23.827) 30.755,22.045 DD1.18 ; DD1.28 36.75,27.75 36.9,27.6 v3(37.4,27.6) ; v1(39.4,34) R12.2
  Top Layer w0.5: HL2.2 28.65,36.05 30,34.7 DD1.39
  Top Layer w0.75: C1.2 6.25,34.85 v1(6.2,34.8) 6.2,29.3 9.1,26.4 11.65,26.4 12.15,25.9 C3.1 C2.1 ; v1(16.6,1.6) 17.6,1.6 19.2,3.2 R19.1 ; v3(25.8,35) 26.6,35 26.9,35.3 HL2.2 ; DA1.4 31.062,67.638 v1(31.1,67.6) ; HL3.2 R6.2 R10.2 ; v3(38.2,40.7) 38.65,40.25 R10.2 ; C7.2 R10.2 ; C20.2 39.6,17.1 BR1.4 48.45,16.25 53.35,11.35 HL1.2 53.35,8.15 v1(53.3,8.1) ; C6.2 42.15,46.95 v3(42.2,47) ; C8.2 44.237,33.3 46.337,31.2 47.2,31.2 ; v5(49.3,25.7) 47.2,27.8 47.2,31.2 ; v3(51.5,34) 48.7,31.2 47.2,31.2
  Bottom Layer w0.4: v1(30.755,23.827) 29.935,23.827 28.163,25.6 26.3,25.6 25.5,24.8 25.5,22.7 27.3,20.9 34.6,20.9 35.1,20.4 C19.2
  Bottom Layer w0.5: C13.2 22.45,25.45 24.2,27.2 26.3,27.2 v1(26.2,27.1) ; v3(37.4,27.6) C18.2
  Bottom Layer w0.75: v3(25.8,35) 26.55,35.75 C15.2 ; C19.2 38.1,16.25 BR1.4 ; BR1.3@35.9,2.6 BR1.3
  other v1: 50.5,65.7
MISO: DD1.2 XP6.2 | length 35.4
  Top Layer w0.4: v2(22.3,30.8) 22.45,30.95 DD1.2
  Bottom Layer w0.5: XP6.2 5.68,27.58 8.2,30.1 9.2,30.1 9.7,30.1 10.7,30.1 10.7,27.843 11.7,27.843 11.7,30.1 12.7,30.1 12.7,27.843 13.7,27.843 13.7,30.1 14.7,30.1 14.7,27.843 15.7,27.843 15.7,30.1 16.3,30.1 21.6,30.1 v2(22.3,30.8)
MOSI: DD1.1 XP6.1 | length 34.9
  Top Layer w0.4: v2(21.7,31.7) 24.2,31.7 DD1.1
  Bottom Layer w0.5: XP6.1 4.73,31.1 5.23,31.1 6.23,31.1 6.23,30.261 7.23,30.261 7.23,31.1 7.23,34.1 8.23,34.1 8.23,31.1 9.23,31.1 9.23,34.1 10.23,34.1 10.23,31.1 11.23,31.1 11.4,31.1 21.1,31.1 v2(21.7,31.7)
NetC5_1: C5.1 DA1.3 | length 9.8
  Top Layer w0.75: DA1.3 28.8,68.8 29.75,69.75 C5.1 C5.1@35.27,69.02
NetC9_1: C9.1 L1.2 L3.1 R9.2
NetC10_2: C10.2 C11.1 | length 4.3
  Top Layer w0.75: C11.1 40.119,30.981 C10.2
NetC16_1: C16.1 R21.1 | length 2.2
  Top Layer w1: R21.1 C16.1
NetC16_2: C16.2 R17.2 R19.2 SB2.1
NetDA1_1: DA1.1 DA1.7 DA1.8 R4.2 | length 14.4
  Top Layer w0.75: R4.2 20.5,68.3 21.162,67.638 DA1.1 DA1.8 DA1.7
NetDA1_2: DA1.2 L1.1 VD1.2 | length 15.7
  Top Layer w0.75: 25.75,61.05 24.7,62.1 21.6,62.1 21.2,62.5 21.2,65 22.3,66.1 27,66.1 27.53,66.63 DA1.2
NetDA1_5: DA1.5 R7.2 R9.1 | length 25.4
  Top Layer w0.5: R9.1 37.05,65.05 39.9,67.9 39.9,71.5 38.2,73.2 DA1.5
NetDD1_15: DD1.15 R2.1 | length 32
  Top Layer w0.4: v2(26.9,15.7) 26.9,16.2 26.7,16.4 28.4,18.1 DD1.15
  Top Layer w0.75: v4(28.2,12) 28.325,12.125 36.625,12.125 37.6,13.1 R2.1
  Bottom Layer w0.75: v2(26.9,15.7) 26.9,13.7 26.7,13.5 v4(28.2,12)
NetHL1_1: HL1.1 R2.2 | length 2.5
  Top Layer w0.75: R2.2 50.5,10.4 HL1.1
NetHL2_1: HL2.1 R1.2 | length 2.7
  Top Layer w0.75: R1.2 HL2.1
NetHL3_1: HL3.1 R22.1
NetR13_1: R13.1 XP4.1 | length 4
  Top Layer w1: R13.1 50.2,43 50.45,42.75 XP4.1
NetR14_1: R14.1 XP4.2 | length 3.9
  Top Layer w1: R14.1 XP4.2
NetR15_1: R15.1 XP4.3 | length 4
  Top Layer w1: R15.1 47.85,37.75 XP4.3
RESET: C1.1 DD1.4 R3.1 SB1.4 XP6.4 | length 56.9
  Top Layer w0.4: SB1.4 19.075,30.425 20.15,29.35 DD1.4
  Top Layer w0.75: XP6.4 1.8,22.5 1.3,23 1.3,34.6 4.25,37.55 C1.1 9.4,38.9 10.1,39.6 17.6,39.6 ; SB1.4 17.114,32.786 16.4,33.5 16.4,38.4 17.6,39.6 ; R3.1 21.75,38.45 20.6,39.6 17.6,39.6
RxD: DD1.9 XP3.1 | length 10.5
  Top Layer w0.4: XP3.1 20.5,20.25 20.5,22.75 23.1,25.35 DD1.9
SCK: DD1.3 R1.1 XP6.3 | length 34
  Top Layer w0.4: DD1.3 25.117,30.15 25.8,29.467 v2(25.8,29.3) ; R1.1 24.25,33.119 25.35,32.019 25.35,30.681 25.3,30.631 25.3,30.037 25.505,29.832
  Bottom Layer w0.5: XP6.3 16.94,25.04 17.8,25.9 17.8,28.3 18.8,29.3 v2(25.8,29.3)
TxD: DD1.10 XP3.2 | length 9.2
  Top Layer w0.4: DD1.10 23.3,24.55 22.25,23.5 22.25,21.04 XP3.2
UP_U: DD1.14 XP2.1 | length 30.1
  Top Layer w0.4: v2(27.4,24.3) 27.6,24.1 DD1.14
  Bottom Layer w1: v2(27.4,24.3) 27.4,23.5 29,21.9 32.339,21.9 32.539,22.1 38.5,22.1 43.6,17 XP2.1
UP_V: DD1.16 XP2.3 | length 42.2
  Top Layer w0.4: v2(28.4,16.6) 29.2,17.4 DD1.16
  Bottom Layer w0.4: v2(28.4,16.6) 28.4,14.2 29.5,13.1 50.1,13.1 53.4,16.4 53.4,21.5 52.9,22 XP2.3
UP_W: DD1.13 XP2.5 | length 31.3
  Top Layer w0.4: DD1.13 26.8,23.2 26.4,23.6 26.4,25.1 28,26.7 ; 28,26.8 30.5,26.8 v2(32.1,28.4)
  Bottom Layer w0.75: v2(32.1,28.4) 33.3,29.6 43.3,29.6 45.9,27 XP2.5
XTAL1: C2.2 DD1.8 ZQ1.1 | length 13.3
  Top Layer w0.4: ZQ1.1 18.5,21.75 22.9,26.15 DD1.8
  Top Layer w0.75: C2.2 18.13,19.5 ZQ1.1
XTAL2: C3.2 DD1.7 ZQ1.3 | length 10.3
  Top Layer w0.4: ZQ1.3 20.7,26.95 DD1.7
  Top Layer w0.75: C3.2 ZQ1.3
pads on no net: BR1.- DD1.21 DD1.22 DD1.23 DD1.24 DD1.25 DD1.26 DD1.30 DD1.31 DD1.32 DD1.33 DD1.34 DD1.43 SB1.2 SB1.3 SB2.2 SB2.3

## Polygon pours and split planes (outlines as drawn)
GND on Top Layer "12V_pol1" (solid, remove dead copper, pour order 30): 33.5,76.5 53,76.5 54,75.5 54,44.5 53.5,44 48.5,44 47,45.5 47,54.5 46,55.5 42,55.5 41.5,56 41.5,61 38.5,64 38.5,65.5 40.5,67.5 40.5,72 39,73.5 33.5,73.5
NetDA1_5 on Top Layer "12V_pol1" (solid, remove dead copper, pour order 24): 21.8,64.7 21.8,63.1 22.3,62.6 26.4,62.6 27.6,63.8 30,63.8 30.5,64.3 30.5,65.3 29.9,65.9 27.7,65.9 27.3,65.5 22.5,65.5
GND on Top Layer "12V_pol1" (solid, remove dead copper, pour order 16): 13.5,60 13.5,51.2 11.6,49.3 11.5,49.4 2.2,49.4 0.9,48.1 0.9,41.6 4,38.5 7.6,38.5 9.5,40.4 17.5,40.4 19.2,42.1 19.2,49 21.7,51.5 26.8,51.5 27.3,52 27.3,56 26.2,57.1 25.1,57.1 25.1,57.2 24.2,58.1 24.2,61.6 23.5,62.3 21.1,62.3 18.8,60
NetC9_1 on Top Layer "Top Overlay-No Net" (solid, remove dead copper, pour order 10): 33.3,60.5 33.3,51.3 34.2,50.4 34.2,47.7 35.6,46.3 39,46.3 41.1,44.2 43.4,44.2 43.7,44.5 43.7,46.7 44.1,47.1 45.1,47.1 46.5,48.5 46.5,54.2 45.8,54.9 42.1,54.9 40.9,56.1 40.9,60.5
NetHL3_1 on Top Layer "12V_pol1" (solid, remove dead copper, pour order 20): 32.2,44 32.2,42 35.4,42 35.6,42.2 35.6,44
+5V on Top Layer "Top Overlay-No Net" (solid, remove dead copper, pour order 8): 20,48.5 20,44.5 20.5,44 26.8,44 29,41.8 31.4,41.8 32.1,42.5 32.1,44.1 33.8,45.8 33.8,49.4 33.4,49.8 20.5,49.8
NetC16_2 on Top Layer "POL_C16_2" (solid, remove dead copper, pour order 2): 15,3 18,3 18.5,3.5 18.5,7.2 19,7.7 20.5,7.7 25.1,7.7 25.1,14 19.8,14 19.4,13.6 19.4,10.8 19.1,10.5 15,10.5
GND on Top Layer "GND_POL_ENC" (solid, remove dead copper, pour order 4): 18.35,7.125 18.35,5.114 18.664,4.8 23.5,4.8 24.2,4.1 24.2,1.7 24.4,1.5 28.2,1.5 29.5,2.8 34.6,2.8 35.1,2.3 35.1,0.8 35.5,0.4 37.2,0.4 37.6,0.8 37.6,4.6 36.7,5.5 28.1,5.5 26.5,7.1 25.3,7.1
NetDA1_2 on Top Layer "12V_pol1" (solid, remove dead copper, pour order 18): 24.5,62 24.5,58.3 25.3,57.5 26.4,57.5 27.6,56.3 27.6,51.4 28.4,50.6 32,50.6 32.6,51.2 32.6,61.9 32.5,62
NetC9_1 on Top Layer "12V_pol1" (solid, remove dead copper, pour order 22): 28.7,63.2 28.7,61.5 29.7,60.5 33.3,60.5 33.3,58.3 34.1,57.5 36.9,57.5 38.6,59.2 38.6,62.6 38,63.2
+12V on Top Layer "12V_pol1" (solid, remove dead copper, pour order 28): 0.5,50.5 1,50 11.5,50 12.5,51 12.5,60 13,60.5 18.5,60.5 20,62 20,67.5 19,68.5 19,71.5 24,71.5 25,72.5 25,74 25.5,74.5 28,74.5 28.5,74 28.5,71.5 29,71 30.5,71 32.5,73 32.5,76.5 0.5,76.5
AVCC on Top Layer "AVVCPOLigon" (solid, remove dead copper, pour order 0): 37.1,23.6 41,23.6 41.85,22.75 45.25,22.75 45.8,23.3 45.8,25.6 45.5,25.9 37.1,25.9
GND on Bottom Layer "GND_L02_P036" (solid, remove dead copper, pour order 36): 53.5,0.5 ccw(c53.5,1.5) 54.5,1.5 54.5,76 ccw(c53.5,76) 53.5,77 2,77 ccw(c2,75.5) 0.5,75.5 0.5,2 ccw(c2,2) 2,0.5

## Other copper
Top Layer:
  pour cut-out: 27.1,72.5 27.2,72.6 31.9,72.6 31.9,70.6 27.1,70.6
  pour cut-out: 30.7,65.6 27.8,65.6 27.6,65.8 27.9,66.1 30.7,66.1
  pour cut-out: 30.6,64.5 30.6,63.6 30.3,63.3 27.6,63.3 27.5,63.4 27.5,64.5
  pour cut-out: 45.1,47.1 34.4,47.1 34.2,46.9 34.2,44.6 34.7,44.1 45.1,44.1
  pour cut-out: 27.6,62 27.6,61.3 32.4,61.3 32.4,60.3 32.6,60.3 32.6,62
  pour cut-out: 22.15,61.175 19.997,61.175 19.986,61.186 20.657,61.857
Bottom Layer:
  pour cut-out: 51.05,28.9 51.05,27.65 46.025,27.65 43.55,30.125 33.225,30.125 31.575,28.475 31.575,27.75 31.325,27.5 29,27.5 29,26.475 30.525,24.95 30.525,24.417 28.733,22.625 22.375,22.625 22.293,22.707 22.293,24.768 24.25,26.725 25.35,26.725 25.35,30.6 27.163,32.413 31.787,32.413 33.325,30.875 45.25,30.875 47.2,28.925 49.5,28.925
  pour cut-out: 50,31.3 53.225,31.3 53.225,12.25 50,12.25
  pour cut-out: 50,22.45 50,13.3 28.625,13.3 28.625,22.375
  pour cut-out: 4.2,27.35 4.2,25.6 16.95,25.6 17.45,26.1 17.45,28.625 18.325,29.5 18.325,29.85 16.15,29.85 16.1,29.8 16.125,29.775 16.125,27.925 15.825,27.625 10.95,27.625 10.3,28.275 10.3,29.9 7.175,29.9 5.75,28.475 4.1,28.475
  pour cut-out: 2.05,32.55 2.05,18.577 6.725,18.577 6.725,32.55
  pour cut-out: 32.625,7.8 32.625,12.65 29.525,12.65 27.975,14.2 27.975,16.875 27.75,17.1 27.1,16.45 27.1,16.075 27.45,15.725 27.45,13.475 28.7,12.225 28.7,9.675 28.175,9.15 28.175,7.075 31.525,7.075 32.25,7.8
  pour cut-out: 33.65,5.95 33.65,0.75 34.025,0.375 38.45,0.375 38.625,0.55 38.625,5.95

## Silkscreen, mask and mechanical layers (free items; w line width, h text height)
Top Overlay:
  text "U" at 49.325,42.425 h1
  text "V" at 49.325,39.75 h1
  text "W" at 49.3,37.15 h1
  text "DW" at 46.65,29.425 h1
  text "UW" at 46.65,26.575 h1
  text "DV" at 46.65,24.025 h1
  text "UV" at 46.65,21.45 h1
  text "DU" at 46.65,19.225 h1
  text "UU" at 46.65,16.575 h1
Board:
  lines w0.25: 0,2.5 0,1.27 ccw(c1.27,1.27) 1.27,0 2.5,0 ; 0,75 0,76.23 cw(c1.27,76.23) 1.27,77.5 2.5,77.5 ; 52.5,0 53.73,0 ccw(c53.73,1.27) 55,1.27 55,2.5 ; 52.5,77.5 53.73,77.5 cw(c53.73,76.23) 55,76.23 55,75
  lines w0.254: 0,2.5 0,75 ; 2.5,0 52.5,0 ; 2.5,77.5 52.5,77.5 ; 55,2.5 55,75

## Text inside footprints (layer, text, board x,y; h text height)
XP1: Top Overlay "VCC" at 6.417,66 h1; Top Overlay "GND" at 6.29,60.666 h1
XP5: Top Overlay "VCC" at 6.417,53.25 h1; Top Overlay "GND" at 6.29,47.916 h1
XP6: Top Overlay "MOSI" at 5.45,29.72 h1; Top Overlay "MISO" at 5.45,26.92 h1; Top Overlay "SCK" at 5.35,24.42 h1; Top Overlay "RESET" at 5.35,21.92 h1; Top Overlay "VCC" at 5.375,19.42 h1; Top Overlay "GND" at 5.275,16.97 h1